# EAGLE board blindsRotate (EAGLE 9.6.2)
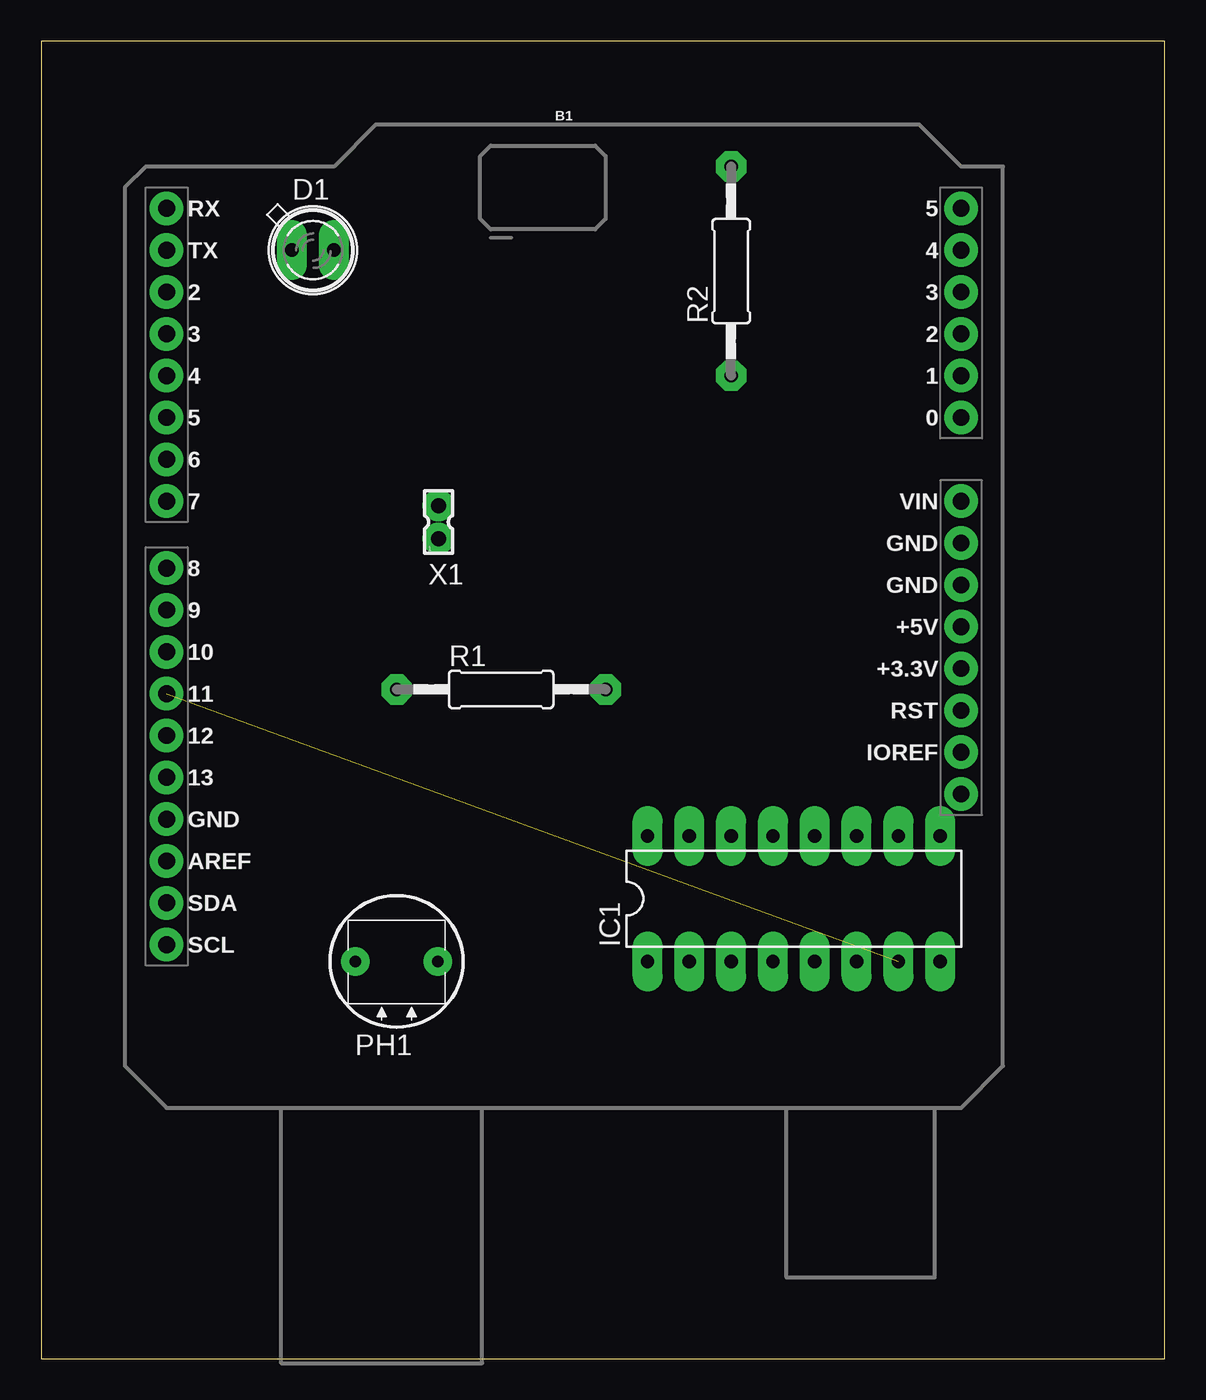
[diagram p0: board, top side]
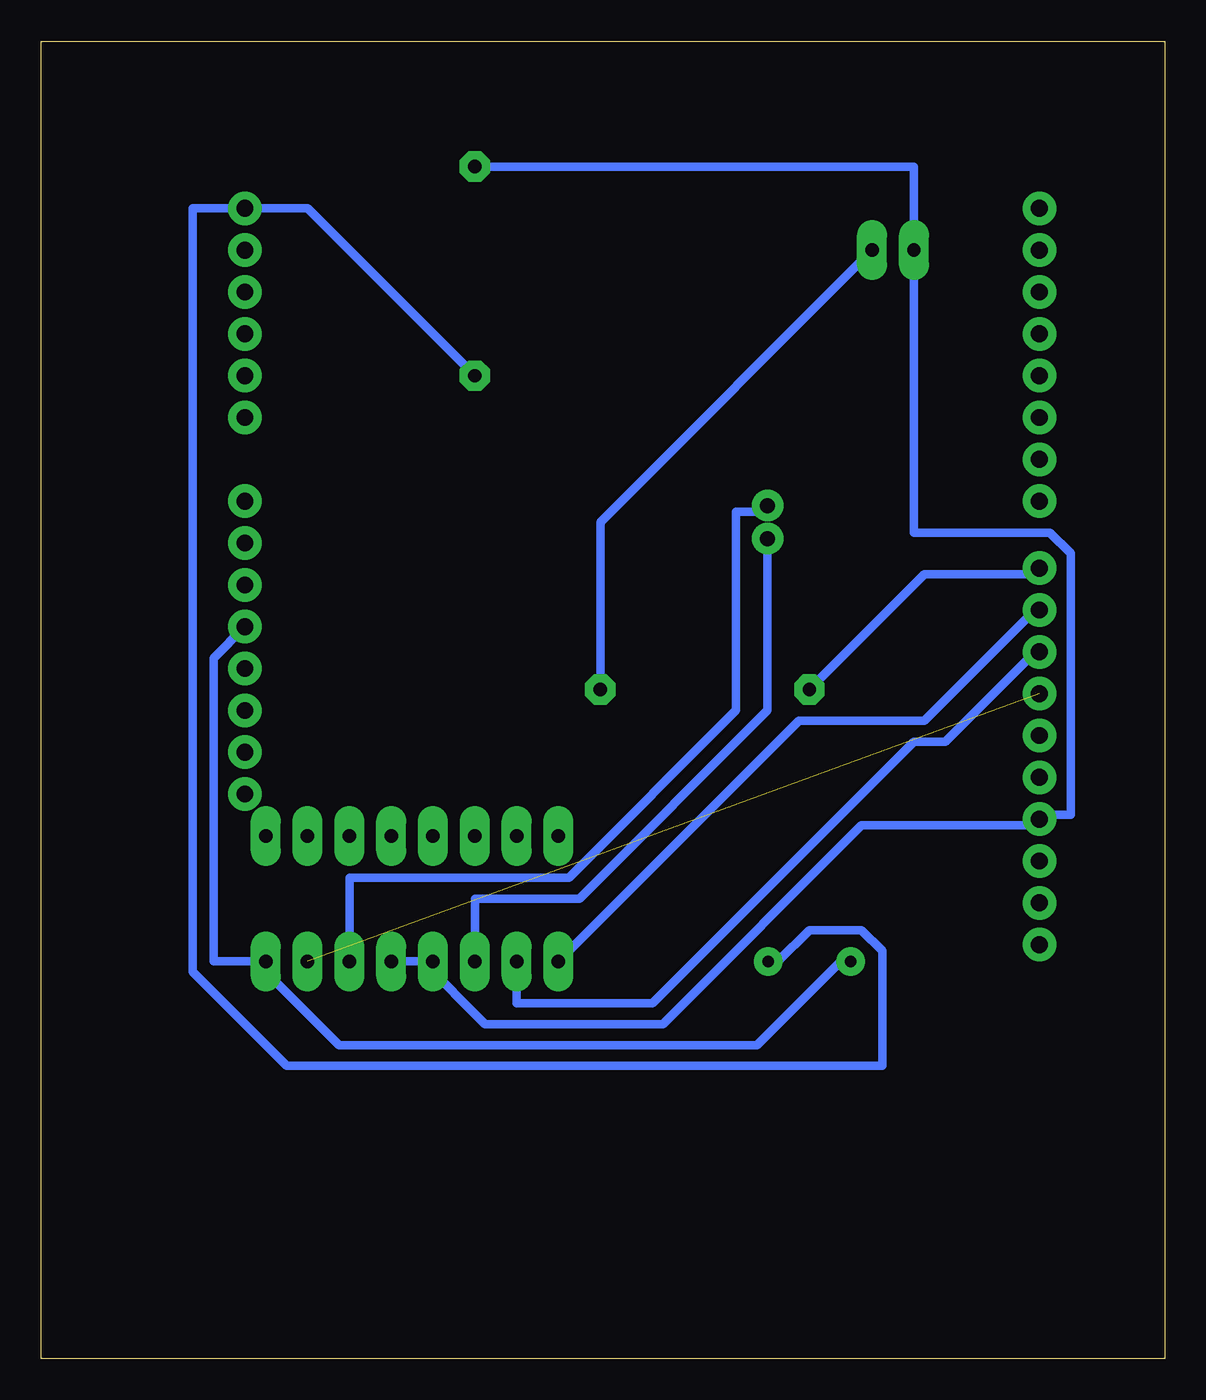
[diagram p1: board, bottom side, seen from below]

Size 68.25 x 80 mm. Coordinates in mm from the lower left corner, seen from the top.
Outline: 0,0 68.25,0 68.25,80 0,80 0,0
Copper layers (1*16): Top 0mil / dielectric 1.5mm / Bottom 0.035mm
Design rules "tad265_drc": minimum track width 20mil, minimum drill 0.35mm, track to track 16mil, track to pad 16mil, pad to pad 16mil, via to via 16mil, smd to smd 16mil, copper to edge 60mil, drill to drill 16mil, minimum pad ring 20mil, minimum via ring 15mil, stop-mask expansion 8mil, vias tented up to drill 0mil, thermal gap 20mil

## Footprints (pad centres in the part's own frame; a part is rotated, then mirrored left to right if it is on the bottom)
UNO_R3_SHIELD = drill 1.016 pad 1.88: 3.3V 24.13,-2.54; 5V 24.13,0; A0 24.13,12.7; A1 24.13,15.24; A2 24.13,17.78; A3 24.13,20.32; A4 24.13,22.86; A5 24.13,25.4; AREF -24.13,-14.224; D2 -24.13,20.32; D3 -24.13,17.78; D4 -24.13,15.24; D5 -24.13,12.7; D6 -24.13,10.16; D7 -24.13,7.62; D8 -24.13,3.556; D9 -24.13,1.016; D10 -24.13,-1.524; D11 -24.13,-4.064; D12 -24.13,-6.604; D13 -24.13,-9.144; GND@0 24.13,2.54; GND@1 24.13,5.08; GND@2 -24.13,-11.684; IOREF 24.13,-7.62; NC 24.13,-10.16; RES 24.13,-5.08; RX -24.13,25.4; SCL -24.13,-19.304; SDA -24.13,-16.764; TX -24.13,22.86; VIN 24.13,7.62
SFH482 = drill 0.813 long: A -1.27,0; K 1.27,0
DIL16 = drill 0.813 long: 1 -8.89,-3.81; 2 -6.35,-3.81; 3 -3.81,-3.81; 4 -1.27,-3.81; 5 1.27,-3.81; 6 3.81,-3.81; 7 6.35,-3.81; 8 8.89,-3.81; 9 8.89,3.81; 10 6.35,3.81; 11 3.81,3.81; 12 1.27,3.81; 13 -1.27,3.81; 14 -3.81,3.81; 15 -6.35,3.81; 16 -8.89,3.81
D11XX = drill 0.7 pad 1.4: 1 -2.5,0; 2 2.5,0
0207/12 = drill 0.813 octagon: 1 -6.35,0; 2 6.35,0
332-02 = drill 0.9 pad 1.27: 1 0,-1; 2 0,1

## Placement (x,y rotation side)
B1  ARDUINO_UNO_R3_SHIELDBASIC  [UNO_R3_SHIELD]  31.75,44.45 0 top
D1  SFH482  [SFH482]  16.51,67.31 0 top
IC1  L293D  [DIL16]  45.72,27.94 0 top
PH1  D1160_12  [D11XX]  21.59,24.13 0 top
R1  [0207/12]  27.94,40.64 0 top
R2  [0207/12]  41.91,66.04 90 top
X1  332-02  [332-02]  24.13,50.8 0 top

## Library data of the parts
B1 = SparkFun-Boards
D1 = led
IC1 = st-microelectronics; MPN: L293D; OC_FARNELL: 9589619; OC_NEWARK: 56P8249
PH1 = photo-elements
R1 R2 = rcl; SPICEPREFIX: R
X1 = con-garry

## Nets
GND3: IC1.13
GND4: IC1.12
N$2: B1.D8 R1.1
N$3: D1.K R1.2
N$4: B1.D9 IC1.1
N$5: B1.D10 IC1.2
N$6: IC1.3 X1.1
N$8: IC1.6 X1.2
N$10: B1.D11 IC1.7
N$12: B1.A5 PH1.2 R2.1
N$13: B1.5V IC1.8 PH1.1
N$14: B1.GND@2 D1.A IC1.4 IC1.5 R2.2
VCC1: IC1.16

## Tracks (layer width: path | path; a pad name or v marks a point on that pad's centre or on a via)
N$2
  Bottom 0.508: R1.1 14.6,47.62 7.62,47.62 B1.D8
N$3
  Bottom 0.508: D1.K 34.29,50.8 R1.2
N$4
  Bottom 0.508: IC1.1 22.23,38.73 14.6,38.73 8.25,45.09 7.62,45.09 B1.D9
N$5
  Bottom 0.508: IC1.2 39.37,21.59 31.12,21.59 15.24,37.47 13.34,37.47 8.25,42.55 7.62,42.55 B1.D10
N$6
  Bottom 0.508: IC1.3 41.91,27.94 35.56,27.94 24.13,39.37 X1.1
N$8
  Bottom 0.508: IC1.6 49.53,29.21 36.2,29.21 26.03,39.37 26.03,51.44 24.13,51.44 X1.2
N$10  (1 unrouted)
N$12
  Bottom 0.508: PH1.2 23.49,24.13 21.59,26.04 18.41,26.04 17.15,24.77 17.15,17.78 53.34,17.78 59.05,23.5 59.05,69.85 B1.A5 52.07,69.85 R2.1
N$13
  Bottom 0.508: PH1.1 19.69,24.13 24.77,19.05 50.16,19.05 54.61,23.5 IC1.8 57.79,24.13 57.79,42.55 B1.5V
N$14
  Bottom 0.508: R2.2 15.24,72.39 D1.A 15.24,50.16 6.98,50.16 5.71,48.9 5.71,33.02 7.62,33.02 B1.GND@2 7.62,32.38 18.41,32.38 30.48,20.32 41.27,20.32 45.09,24.13 | IC1.5 45.09,24.13 | 45.09,24.13 IC1.4